# Altium PCB dv_analog_6_ch(rad_model).PcbDoc
Units mm, origin at the board's own origin, x right, y up, seen from the top; angles counter-clockwise.
Board outline 86 x 62 mm, 2 copper layers (Top Layer, Bottom Layer), stack 1.569 mm thick; 84 components, 72 nets, 239 pads, 7 vias.
Unrouted connection lines stored in the file: 151.
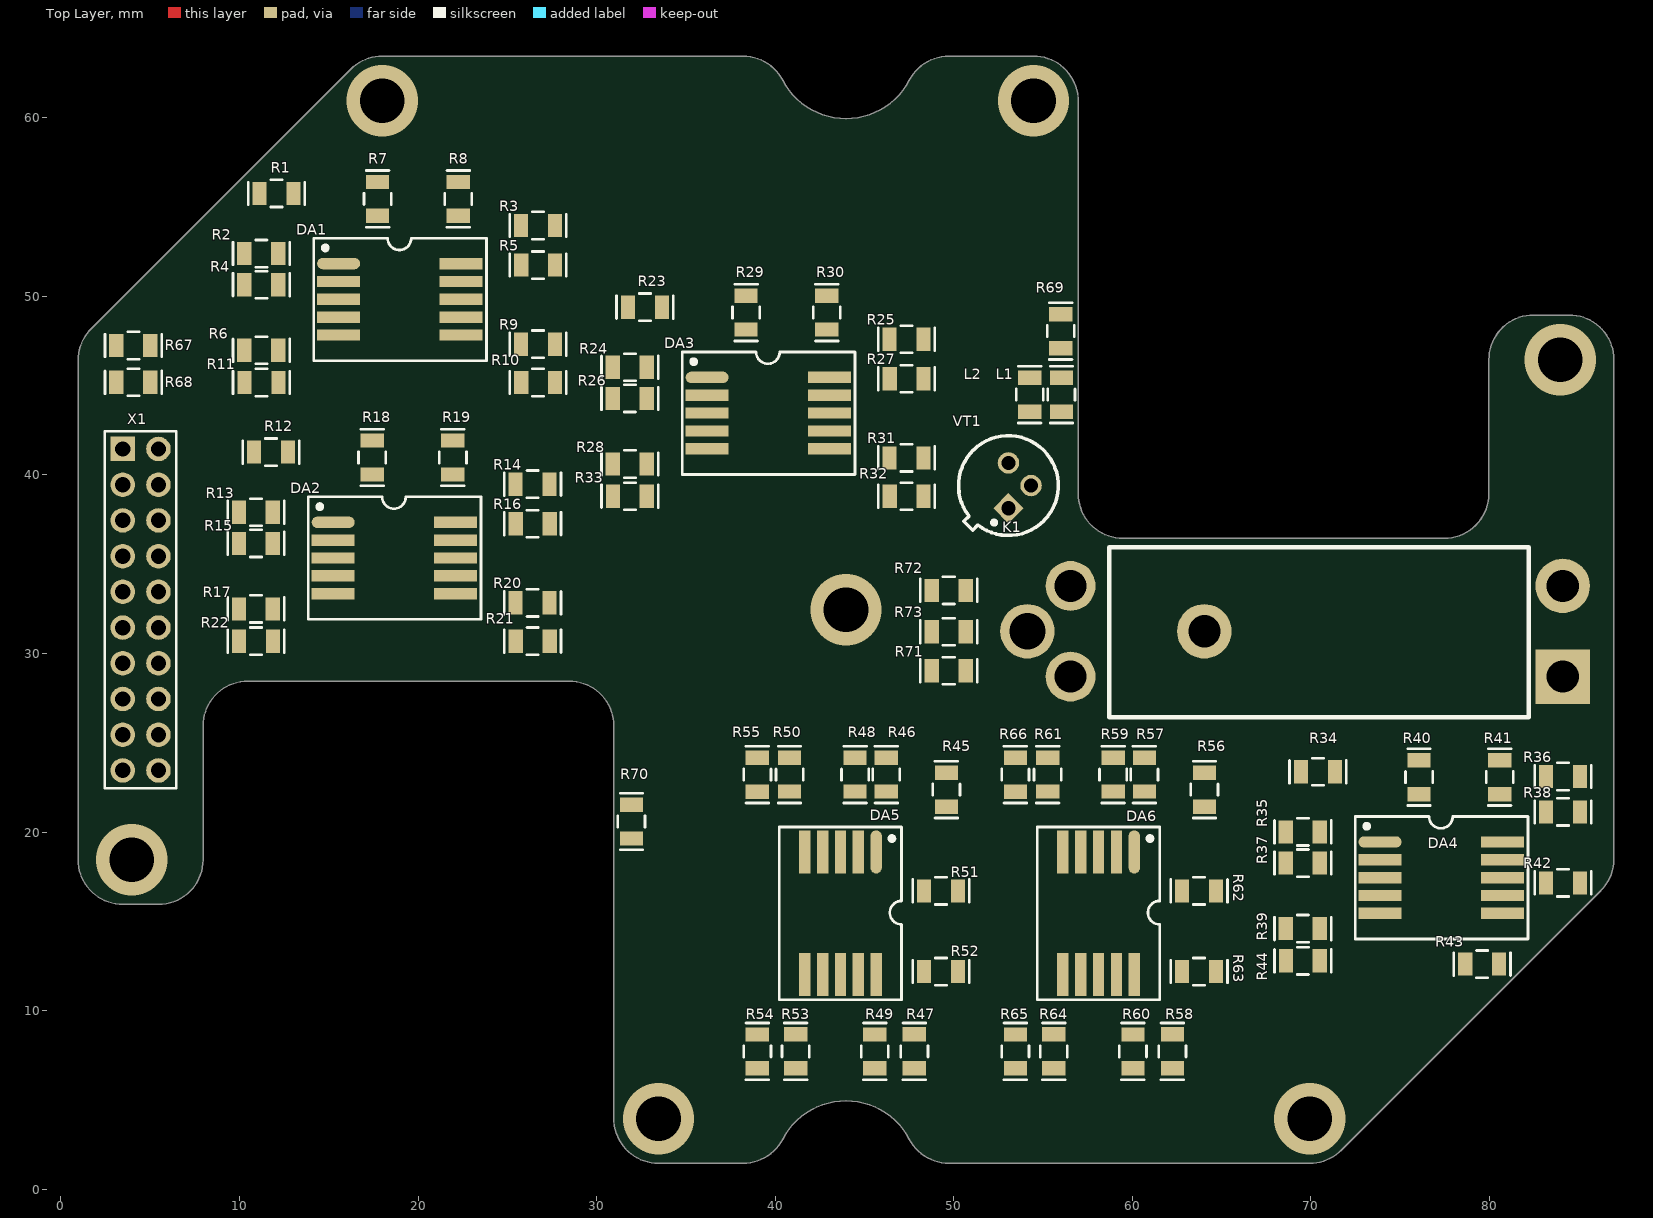
[diagram p0: Top Layer view]
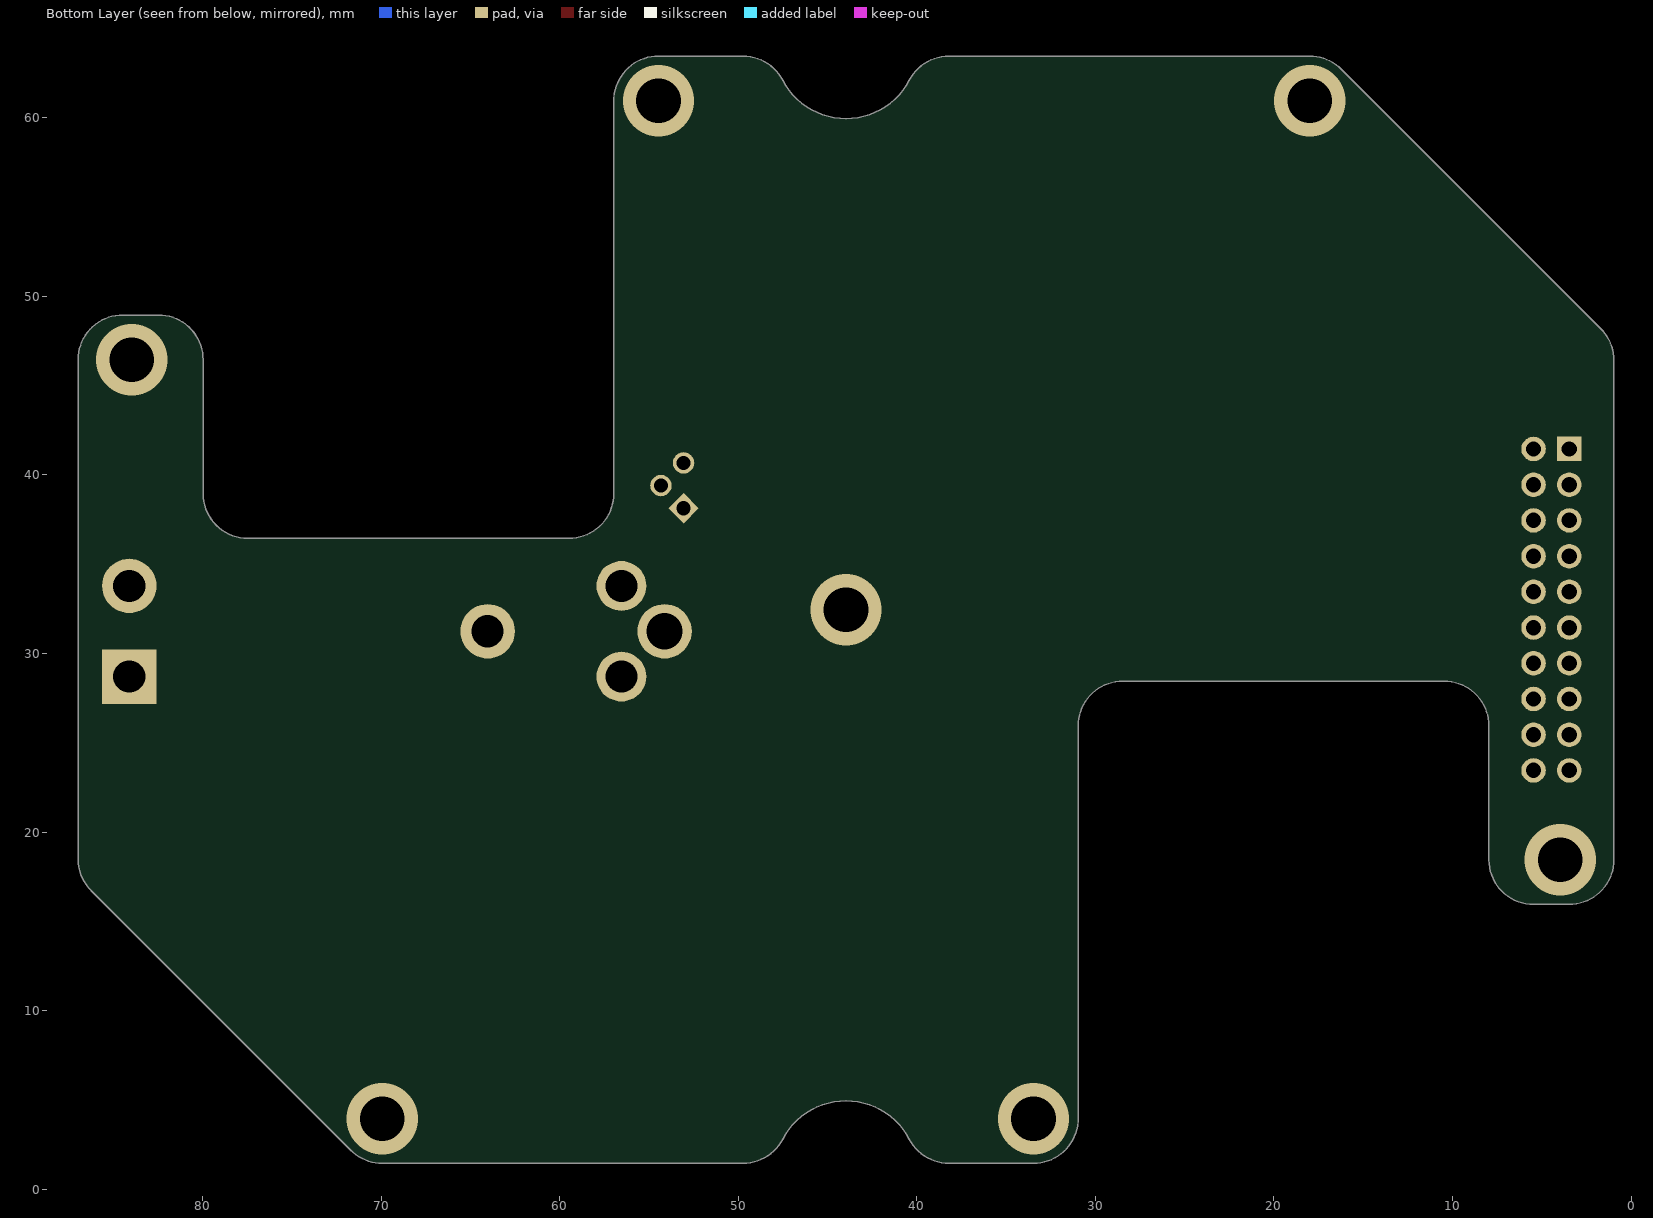
[diagram p1: Bottom Layer view, seen from below]

## Layer stack, top to bottom
Top Solder: solder mask 0.0254, SM-001, Dk 4
Top Layer: signal copper 0.035
Dielectric 1: core 1.4986, Core-043, Dk 4.3
Bottom Layer: signal copper 0.035
Bottom Solder: solder mask 0.0254, SM-001, Dk 4

## Board outline
3.466,15.95 cw(c3.466,18.45) 0.966,18.45 0.966,46.414 cw(c3.466,46.414) 1.699,48.182 16.234,62.718 cw(c18.002,60.95) 18.002,63.45 38.2,63.45 cw(c38.2,60.95) 40.418,62.104 ccw(c43.966,63.95) 47.515,62.104 cw(c49.733,60.95) 49.733,63.45 54.466,63.45 cw(c54.466,60.95) 56.966,60.95 56.966,38.95 ccw(c59.466,38.95) 59.466,36.45 77.466,36.45 ccw(c77.466,38.95) 79.966,38.95 79.966,46.45 cw(c82.466,46.45) 82.466,48.95 84.466,48.95 cw(c84.466,46.45) 86.966,46.45 86.966,18.486 cw(c84.466,18.486) 86.234,16.718 71.699,2.182 cw(c69.931,3.95) 69.931,1.45 49.733,1.45 cw(c49.733,3.95) 47.515,2.796 ccw(c43.966,0.95) 40.418,2.796 cw(c38.2,3.95) 38.2,1.45 33.466,1.45 cw(c33.466,3.95) 30.966,3.95 30.966,25.95 ccw(c28.466,25.95) 28.466,28.45 10.466,28.45 ccw(c10.466,25.95) 7.966,25.95 7.966,18.45 cw(c5.466,18.45) 5.466,15.95

## Design rules (kind name [scope] priority, off if disabled: settings)
Clearance [InNamedPolygon('NONET_L01_P004')] p1: gap=0.254 ignorepadtopadclearanceinfootprint=FALSE except(0: Arc-Hole Track-Hole SMDPad-Hole THPad-Hole Via-Hole Fill-Hole Poly-Hole Region-Hole Text-Hole)
Clearance "Clearance ALL" [All] p2: gap=0.2 ignorepadtopadclearanceinfootprint=TRUE
ComponentClearance [All] p1: gap=0.051 collisioncheckmode=3 verticalgap=0.051 showdistances=FALSE
DiffPairsRouting [InDifferentialPairClass('Diff Class')] p1: maxlimit=0.35 minlimit=0.25 mostfreqgap=0.25 toplayer_minwidth=0.25 toplayer_maxwidth=0.4 toplayer_prefwidth=0.3 bottomlayer_minwidth=0.25 bottomlayer_maxwidth=0.4 bottomlayer_prefwidth=0.3 maxuncoupledlength=12.7
MatchedLengths [InDifferentialPairClass('Diff Class')] p1: tolerance=0.5 checknetsindiffpair=TRUE checkdiffpairvsdiffpair=FALSE checkxsignals=FALSE checkothers=FALSE
PlaneClearance [All] p1: clearance=0.2
PlaneConnect [All] p1: planeconnectstyle=Relief reliefexpansion=0.508 reliefentries=4 reliefconductorwidth=0.4 reliefairgap=0.254
PolygonConnect [All] p1: connectstyle=Relief reliefconductorwidth=0.4 reliefentries=4 polygonreliefangle="90 Angle" airgapwidth=0.2
RoomDefinition dv_analog_interface_ch5 [InComponentClass('dv_analog_interface_ch5')] p1: confinementstyle=ConfineIn formatcopy=TRUE lockcomponents=FALSE outline 37.922,25.908 37.922,5.828 52.121,5.828 52.121,25.908
RoomDefinition dv_analog_interface_ch6 [InComponentClass('dv_analog_interface_ch6')] p2: confinementstyle=ConfineIn formatcopy=TRUE lockcomponents=FALSE outline 52.375,25.908 52.375,5.828 66.573,5.828 66.573,25.908
RoomDefinition dv_analog_interface_ch4 [InComponentClass('dv_analog_interface_ch4')] p3: confinementstyle=ConfineIn formatcopy=FALSE lockcomponents=FALSE outline 66.853,8.211 86.933,8.211 86.933,25.908 66.853,25.908
RoomDefinition dv_analog_main [InComponentClass('dv_analog_main')] p4: confinementstyle=ConfineIn formatcopy=TRUE lockcomponents=FALSE outline -3.649,73.787 379.876,73.787 379.876,117.155 -3.649,117.155
RoomDefinition dv_analog_interface_ch3 [InComponentClass('dv_analog_interface_ch3')] p5: confinementstyle=ConfineIn formatcopy=TRUE lockcomponents=FALSE outline 29.169,37.726 49.248,37.726 49.248,51.924 29.169,51.924
RoomDefinition dv_analog_interface_ch2 [InComponentClass('dv_analog_interface_ch2')] p6: confinementstyle=ConfineIn formatcopy=TRUE lockcomponents=FALSE outline 8.23,29.61 28.309,29.61 28.309,43.808 8.23,43.808
RoomDefinition dv_analog_interface_ch1 [InComponentClass('dv_analog_interface_ch1')] p7: confinementstyle=ConfineIn formatcopy=TRUE lockcomponents=FALSE outline 8.534,44.094 28.614,44.094 28.614,58.293 8.534,58.293
RoutingVias [All] p1: holewidth=0.3 width=0.6 viastyle="Through Hole" minholewidth=0.3 minwidth=0.6 maxholewidth=1 maxwidth=3
SolderMaskExpansion [All] p1: expansion=0.102 istentingtop=FALSE
Width [All] p1: maxlimit=1 minlimit=0.2 preferedwidth=0.2 minimp=50.000000 maximp=50.000000 favimp=50.000000
26 further rules are at their usual default settings.

## Classes and differential pairs
channel class dv_analog_interface_ch: dv_analog_interface_ch1 dv_analog_interface_ch2 dv_analog_interface_ch3 dv_analog_interface_ch4 dv_analog_interface_ch5 dv_analog_interface_ch6
net class input[1..6]: input1 input2 input3 input4 input5 input6
net class data_2[1..6]: data_21 data_22 data_23 data_24 data_25 data_26
net class data_1[1..6]: data_11 data_12 data_13 data_14 data_15 data_16
component class dv_analog_main: K1 L1 L2 R67 R68 R69 R70 R71 R72 R73 VT1 X1 X?
component class dv_analog_interface_ch6: a C?_dv_analog_interface_ch6 DA6 DA?_dv_analog_interface_ch6 R56 R57 R58 R59 R60 R61 R62 R63 R64 R65 R66 R?_dv_analog_interface_ch6
component class dv_analog_interface_ch5: C?_dv_analog_interface_ch5 DA5 DA?_dv_analog_interface_ch5 R45 R46 R47 R48 R49 R50 R51 R52 R53 R54 R55 R?_dv_analog_interface_ch5
component class dv_analog_interface_ch4: DA4 R34 R35 R36 R37 R38 R39 R40 R41 R42 R43 R44
component class dv_analog_interface_ch3: DA3 R23 R24 R25 R26 R27 R28 R29 R30 R31 R32 R33
component class dv_analog_interface_ch2: DA2 R12 R13 R14 R15 R16 R17 R18 R19 R20 R21 R22
component class dv_analog_interface_ch1: DA1 R1 R2 R3 R4 R5 R6 R7 R8 R9 R10 R11

## Components (designator, comment, footprint, x,y, rotation, side; value= is the part's Value field where it differs from the comment)
DA1 "1487UD2U" HO2.8-1B 15.555,51.83 r0 top
DA2 "1487UD2U" HO2.8-1B 15.25,37.345 r0 top (schematic designator DA1)
DA3 "1487UD2U" HO2.8-1B 36.189,45.461 r0 top (schematic designator DA1)
DA4 "1487UD2U" HO2.8-1B 73.873,19.445 r0 top (schematic designator DA1)
DA5 "1487UD2U" HO2.8-1B 45.657,18.887 r270 top (schematic designator DA1)
DA6 "1487UD2U" HO2.8-1B 60.11,18.887 r270 top (schematic designator DA1)
K1 "RES55A" RES55 84.099,28.702 r180 top
L1 "1мкГн" SMD_0805 56.032,43.536 r90 top
L2 "1мкГн" SMD_0805 54.254,45.441 r270 top
R1 "10M" SMD_0805 13.025,55.76 r180 top
R2 "10M" SMD_0805 10.278,52.394 r0 top
R3 "0" SMD_0805 25.769,53.965 r0 top
R4 "0" SMD_0805 10.278,50.648 r0 top
R5 "30k" SMD_0805 27.674,51.75 r180 top
R6 "0" SMD_0805 10.278,46.979 r0 top
R7 "51" SMD_0805 17.738,54.505 r90 top
R8 "1к" SMD_0805 22.255,54.505 r90 top
R9 "1к" SMD_0805 25.769,47.32 r0 top
R10 "0" SMD_0805 27.674,45.174 r180 top
R11 "10M" SMD_0805 12.183,45.174 r180 top
R12 "10M" SMD_0805 12.72,41.275 r180 top (schematic designator R1)
R13 "10M" SMD_0805 9.973,37.909 r0 top (schematic designator R2)
R14 "0" SMD_0805 25.465,39.48 r0 top (schematic designator R3)
R15 "0" SMD_0805 9.973,36.163 r0 top (schematic designator R4)
R16 "30k" SMD_0805 27.37,37.265 r180 top (schematic designator R5)
R17 "0" SMD_0805 9.973,32.494 r0 top (schematic designator R6)
R18 "51" SMD_0805 17.434,40.02 r90 top (schematic designator R7)
R19 "1к" SMD_0805 21.95,40.02 r90 top (schematic designator R8)
R20 "1к" SMD_0805 25.465,32.835 r0 top (schematic designator R9)
R21 "0" SMD_0805 27.37,30.689 r180 top (schematic designator R10)
R22 "10M" SMD_0805 11.878,30.689 r180 top (schematic designator R11)
R23 "10M" SMD_0805 33.659,49.391 r180 top (schematic designator R1)
R24 "10M" SMD_0805 30.912,46.025 r0 top (schematic designator R2)
R25 "0" SMD_0805 46.404,47.596 r0 top (schematic designator R3)
R26 "0" SMD_0805 30.912,44.279 r0 top (schematic designator R4)
R27 "30k" SMD_0805 48.309,45.381 r180 top (schematic designator R5)
R28 "0" SMD_0805 30.912,40.61 r0 top (schematic designator R6)
R29 "51" SMD_0805 38.373,48.136 r90 top (schematic designator R7)
R30 "1к" SMD_0805 42.889,48.136 r90 top (schematic designator R8)
R31 "1к" SMD_0805 46.404,40.951 r0 top (schematic designator R9)
R32 "0" SMD_0805 48.309,38.805 r180 top (schematic designator R10)
R33 "10M" SMD_0805 32.817,38.805 r180 top (schematic designator R11)
R34 "10M" SMD_0805 71.344,23.375 r180 top (schematic designator R1)
R35 "10M" SMD_0805 68.596,20.009 r0 top (schematic designator R2)
R36 "0" SMD_0805 83.165,23.109 r0 top (schematic designator R3)
R37 "0" SMD_0805 68.596,18.263 r0 top (schematic designator R4)
R38 "30k" SMD_0805 85.07,21.123 r180 top (schematic designator R5)
R39 "0" SMD_0805 68.596,14.594 r0 top (schematic designator R6)
R40 "51" SMD_0805 76.057,22.12 r90 top (schematic designator R7)
R41 "1к" SMD_0805 80.573,22.12 r90 top (schematic designator R8)
R42 "1к" SMD_0805 83.165,17.152 r0 top (schematic designator R9)
R43 "0" SMD_0805 80.538,12.605 r180 top (schematic designator R10)
R44 "10M" SMD_0805 70.501,12.789 r180 top (schematic designator R11)
R45 "10M" SMD_0805 49.587,21.417 r90 top (schematic designator R1)
R46 "10M" SMD_0805 46.221,24.165 r270 top (schematic designator R2)
R47 "0" SMD_0805 47.792,8.673 r270 top (schematic designator R3)
R48 "0" SMD_0805 44.475,24.165 r270 top (schematic designator R4)
R49 "30k" SMD_0805 45.577,6.768 r90 top (schematic designator R5)
R50 "0" SMD_0805 40.806,24.165 r270 top (schematic designator R6)
R51 "51" SMD_0805 48.332,16.704 r0 top (schematic designator R7)
R52 "1к" SMD_0805 48.332,12.187 r0 top (schematic designator R8)
R53 "1к" SMD_0805 41.147,8.673 r270 top (schematic designator R9)
R54 "0" SMD_0805 39.001,6.768 r90 top (schematic designator R10)
R55 "10M" SMD_0805 39.001,22.26 r90 top (schematic designator R11)
R56 "10M" SMD_0805 64.04,21.417 r90 top (schematic designator R1)
R57 "10M" SMD_0805 60.674,24.165 r270 top (schematic designator R2)
R58 "0" SMD_0805 62.245,8.673 r270 top (schematic designator R3)
R59 "0" SMD_0805 58.928,24.165 r270 top (schematic designator R4)
R60 "30k" SMD_0805 60.03,6.768 r90 top (schematic designator R5)
R61 "0" SMD_0805 55.259,24.165 r270 top (schematic designator R6)
R62 "51" SMD_0805 62.785,16.704 r0 top (schematic designator R7)
R63 "1к" SMD_0805 62.785,12.187 r0 top (schematic designator R8)
R64 "1к" SMD_0805 55.6,8.673 r270 top (schematic designator R9)
R65 "0" SMD_0805 53.454,6.768 r90 top (schematic designator R10)
R66 "10M" SMD_0805 53.454,22.26 r90 top (schematic designator R11)
R67 "10k" SMD_0805 5.009,47.244 r180 top (schematic designator R12)
R68 "10k" SMD_0805 3.104,45.187 r0 top (schematic designator R13)
R69 "1k" SMD_0805 55.99,47.093 r90 top (schematic designator R14)
R70 "1k" SMD_0805 31.953,19.634 r90 top (schematic designator R15)
R71 "510" SMD_0805 50.673,29.032 r180 top (schematic designator R16)
R72 "1k" SMD_0805 48.768,33.53 r0 top (schematic designator R17)
R73 "3k3" SMD_0805 50.673,31.217 r180 top (schematic designator R18)
VT1 "2T3117A" TO-18 53.061,38.131 r90 top
X1 "Header 2X20" PLD2-20 3.467,41.45 r0 top

## Footprints (in the part's own frame and the unit in brackets; to place one, negate y for a bottom-side part, rotate by r counter-clockwise, add the part's x,y. Pads: shape width x height; smd on the part's side, far side on the other; paste and mask are expansions set on the pad)
HO2.8-1B [mil]
  rect 95x25 smd: 0(0,-78.74) 0(270,-78.74) 2(0,-39.37) 3(0,-118.11) 4(0,-157.48) 5(270,-157.48) 6(270,-118.11) 7(270,-39.37) 8(270,0)
  oval 95x25 smd: 1(0,0)
  silkscreen extent -55,-214 326,56, body extent -30,-207 305,49, height 114
PLD2-20 [mil]
  rect 54x54 hole 34: 1(0,0)
  round 54 hole 34: 2(78.74,0) 3(0,-78.74) 4(78.74,-78.74) 5(0,-157.48) 6(78.74,-157.48) 7(0,-236.22) 8(78.74,-236.22) 9(0,-314.96) 10(78.74,-314.96) 11(0,-393.7) 12(78.74,-393.7) 13(0,-472.44) 14(78.74,-472.44) 15(0,-551.18) 16(78.74,-551.18) 17(0,-629.92) 18(78.74,-629.92) 19(0,-708.66) 20(78.74,-708.66)
  silkscreen extent -39,-748 118,39, body extent -39,-744 118,35, height 232
RES55 [mil]
  round 120 hole 71: 0(790,-100) 2(0,-200)
  rect 120x120 hole 71: 1(0,0)
  round 120 hole 80: 3(1180,-100)
  round 110 hole 71: A(1085,-200) B(1085,0)
  silkscreen extent 75,-285 1000,90, body extent -22,-283 1201,87, height 382
SMD_0805 [mm]
  rect 0.8x1.3 smd: 1(0,0) 2(1.9,0)
  silkscreen extent -0.64,-0.76 2.54,0.76, body extent -0.05,-0.62 1.95,0.63, height 0.43
TO-18 [mm]
  rect 1.2x1.2 hole 0.8 rot 45: 1(0,0)
  round 1.2 hole 0.8: 2(1.27,-1.27) 3(2.54,0)
  silkscreen extent -1.52,-2.79 4.06,2.79, body extent -2.01,-2.93 4.23,3.31, height 5.43

## Part data
DA1 DA2 DA3 DA4 DA5 DA6: "Сдвоенный операционный усилитель", Назначение="Сдвоенный операционный усилитель", Наименование="1487УД2У \"ВП\"", Потребление, Вт=0,01
K1: library part RES55, "Одностабильное неполяризованное герконовое реле", ComponentLink1Description=DataSheet, ComponentLink1URL=https://eandc.ru/pdf/rele/res55.pdf, Назначение="Одностабильное неполяризованное герконовое реле", Наименование="РЭС55А РС4.569.600-04 \"ОСМ\"", Потребление, Вт=0,03
L1 L2: library part Inductor, "Inductor", Назначение=SMD-индуктивность, Наименование=Индуктивность, Потребление, Вт=0,010
R1 R2 R3 R4 R5 R6 R7 R8 R9 R10 R11 R12 R13 R14 R15 R16 R17 R18 R19 R20 R21 R22 R23 R24 R25 R26 R27 R28 R29 R30 R31 R32 R33 R34 R35 R36 R37 R38 R39 R40 R41 R42 R43 R44 R45 R46 R47 R48 R49 R50 R51 R52 R53 R54 R55 R56 R57 R58 R59 R60 R61 R62 R63 R64 R65 R66 R67 R68 R69 R70 R71 R72 R73: library part Resistor, "Resistor", Назначение=SMD-резистор, Наименование="ОСМ Р1-12", Потребление, Вт=0,001, Точность=%
VT1: "Кремниевый биполярный / эпитаксиально-планарный / n-p-n транзистор", ComponentLink1Description=DataSheet, ComponentLink1URL=https://www.integral.by/sites/default/files/pdf/2t3117.pdf, Назначение="Биполярный транзистор", Наименование="2Т3117А/ПК \"ОСМ\"", Потребление, Вт=0,0
X1: "Header, 20-Pin, Dual row", Назначение="Header, 20-Pin, Dual row", Наименование=PLD2-20, Потребление, Вт=0,0

## Via types
v1: diameter 4, hole 2.5, Top Layer to Bottom Layer, 7 vias

## Nets (pads, with @x,y where several pads share a name; then routed paths per layer and width w, separated by ;. In a path a pad name is that pad's centre, name@x,y a point inside that pad or via, vN(x,y) a via of type N, cw(c..) or ccw(c..) an arc to the next point about the centre after c; other vN are vias at no path point)
+3.3V: L1.2 L2.1 R71.2 X1.17
+3.3VA: DA1.4 DA2.4 DA3.4 DA4.4 DA5.4 DA6.4 L1.1 R67.2 R69.2 R70.2 X1.19
data_11: R7.2 R8.1 X1.15
data_12: R18.2 R19.1 X1.13
data_13: R29.2 R30.1 X1.11
data_14: R40.2 R41.1 X1.9
data_15: R51.2 R52.1 X1.7
data_16: R62.2 R63.1 X1.5
data_21: R10.2 X1.16
data_22: R21.2 X1.14
data_23: R32.2 X1.12
data_24: R43.2 X1.10
data_25: R54.2 X1.8
data_26: R65.2 X1.6
GND: L2.2 R68.1 R73.1 VT1.1 X1.18
GNDA: DA1.8 DA2.8 DA3.8 DA4.8 DA5.8 DA6.8 R11.1 R22.1 R33.1 R44.1 R55.1 R66.1 X1.20
GPIO_0: X1.1
GPIO_1: R72.2 X1.2
input1: R6.1 R11.2
input2: R17.1 R22.2
input3: R28.1 R33.2
input4: R39.1 R44.2
input5: R50.1 R55.2
input6: R61.1 R66.2
NetC1_1: DA1.3 R1.1 R6.2
NetC1_2: R4.1
NetC2_1: DA1.7 R3.2 R5.2 R10.1
NetC2_2: DA1.5 R9.2
NetC5_2: R3.1 R5.1 R8.2 R9.1
NetC8_1: DA2.3 R12.1 R17.2
NetC8_2: R15.1
NetC9_1: DA2.7 R14.2 R16.2 R21.1
NetC9_2: DA2.5 R20.2
NetC12_2: R14.1 R16.1 R19.2 R20.1
NetC15_1: DA3.3 R23.1 R28.2
NetC15_2: R26.1
NetC16_1: DA3.7 R25.2 R27.2 R32.1
NetC16_2: DA3.5 R31.2
NetC19_2: R25.1 R27.1 R30.2 R31.1
NetC22_1: DA4.3 R34.1 R39.2
NetC22_2: R37.1
NetC23_1: DA4.7 R36.2 R38.2 R43.1
NetC23_2: DA4.5 R42.2
NetC26_2: R36.1 R38.1 R41.2 R42.1
NetC29_1: DA5.3 R45.1 R50.2
NetC29_2: R48.1
NetC30_1: DA5.7 R47.2 R49.2 R54.1
NetC30_2: DA5.5 R53.2
NetC33_2: R47.1 R49.1 R52.2 R53.1
NetC36_1: DA6.3 R56.1 R61.2
NetC36_2: R59.1
NetC37_1: DA6.7 R58.2 R60.2 R65.1
NetC37_2: DA6.5 R64.2
NetC40_2: R58.1 R60.1 R63.2 R64.1
NetDA1_1: DA1.1 R2.2 R4.2 R7.1
NetDA2_1: DA2.1 R13.2 R15.2 R18.1
NetDA3_1: DA3.1 R24.2 R26.2 R29.1
NetDA4_1: DA4.1 R35.2 R37.2 R40.1
NetDA5_1: DA5.1 R46.2 R48.2 R51.1
NetDA6_1: DA6.1 R57.2 R59.2 R62.1
NetK1_A: K1.A R71.1
NetK1_B: K1.B VT1.3
NetR1_2: R1.2 R2.1
NetR12_2: R12.2 R13.1
NetR23_2: R23.2 R24.1
NetR34_2: R34.2 R35.1
NetR45_2: R45.2 R46.1
NetR56_2: R56.2 R57.1
NetR72_1: R72.1 R73.2 VT1.2
Temp_1: R69.1 X1.3
Temp_2: R70.1 X1.4
Voffset: DA1.2 DA1.6 DA2.2 DA2.6 DA3.2 DA3.6 DA4.2 DA4.6 DA5.2 DA5.6 DA6.2 DA6.6 R67.1 R68.2
pads on no net: DA1.0 DA2.0 DA3.0 DA4.0 DA5.0 DA6.0 K1.0 K1.1 K1.2 K1.3
copper on no net:
  other v1: 33.466,3.95 69.931,3.95 3.966,18.45 43.966,32.45 83.967,46.45 18.002,60.95 54.466,60.95

## Silkscreen, mask and mechanical layers (free items; w line width, h text height)
Mechanical 1:
  drawing of 157 lines, arcs and shapes, not listed